# Allegro board max30208_hsp3_demo_b.brd
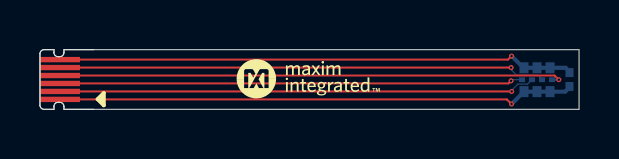
[diagram p0: board, top side]
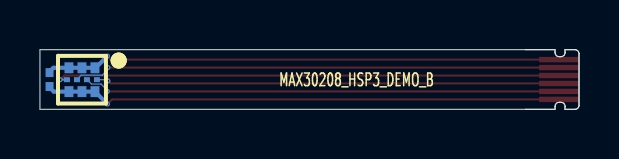
[diagram p1: board, bottom side, seen from below]

Outline 26.98 x 3 mm; copper layers: TOP, BOTTOM. Coordinates in mm from the lower left corner of the outline.
Outline path: 0,2.8 arc(0.06,2.94) 0.2,3 0.7,3 0.7,2.85 arc(0.76,2.71) 0.9,2.65 1,2.65 arc(1.14,2.71) 1.2,2.85 1.2,3 26.98,3 26.98,0 1.2,0 1.2,0.15 arc(1.14,0.29) 1,0.35 0.9,0.35 arc(0.76,0.29) 0.7,0.15 0.7,0 0.2,0 arc(0.06,0.06) 0,0.2 0,2.8

## Design rules (mm)
constraint set DEFAULT: min track width 0.064

## Placement (name value [footprint] x y rotation side)
C1  0.1UF  [CAPC0603X33M]  26.5 1.5 270 bottom
J1  TF13BA-6S-0.4SH_EDGE  [HRSC_TF13BA-6S-0_4SH_EDGE]  0 1.5 90 top
NOREF  -  []  3.79 5.04 0 top
NOREF#2  -  []  0 2.69 0 top
NOREF#3  -  []  10.82 1.53 0 top
NOREF#4  -  []  198.23 -26.02 0 top
NOREF#5  -  []  8.24 107.28 0 top
NOREF#6  -  []  23.16 -8.28 0 top
NOREF#7  -  []  26.93 0 90 top
NOREF#8  -  []  -0.03 -7.71 0 top
NOREF#9  -  []  12.68 -12.7 0 top
U1  MAX30208  [MAX_90-100101_1-10]  24.88 1.49 270 bottom

## Library data of the parts
C1 = CAP_NP: alternate symbols: 0201_NOSILK,CAPC0603X23L; part number: CAP_NP_0201CAPM-CAPC0603X33M,0.1UF,20-000U1-DA39
J1 = TF13BA-6S: part number: TF13BA-6S_SMD_EDGE-HRSC_TF13BA-6S-0_4SH_EDGE,TF13BA-6S-0.4SH_EDGE,N/A
U1 = EK_MAX30208: part number: EK_MAX30208_LGA10-MAX_90-100101_1-10,MAX30208,N/A

## Footprints (pads in the part's own frame, mm; a bottom-side part is the same pattern mirrored in y, then rotated)
CAPC0603X33M
  rect 0.45x0.4 smd: 1(-0.35,0) 2(0.35,0)
HRSC_TF13BA-6S-0_4SH_EDGE
  rect 0.27x2 smd: 1(-1,-1) 2(-0.6,-1) 3(-0.2,-1) 4(0.2,-1) 5(0.6,-1) 6(1,-1)
MAX_90-100101_1-10
  rect 0.55x0.45 smd: 1(-0.6,0.65) 2(-0.6,0) 3(-0.6,-0.65) 4(0.6,-0.65) 5(0.6,0) 6(0.6,0.65)
  rect 0.25x0.3 smd: 7(0,0.75) 8(0,0.25) 9(0,-0.25) 10(0,-0.75)

## Nets
GND_SIGNAL: C1.2 J1.1 U1.4 U1.5 U1.6
UNNAMED_1_CAPNP_I3_1: C1.1 J1.6 U1.1 U1.2 U1.3
UNNAMED_1_EKMAX30208_I4_7: J1.3 U1.7
UNNAMED_1_EKMAX30208_I4_8: J1.2 U1.8
UNNAMED_1_EKMAX30208_I4_9: J1.5 U1.9
UNNAMED_1_EKMAX30208_I4_10: J1.4 U1.10

## Via types
v1: diameter 0.254, hole 0.127, TOP to BOTTOM, 6 vias

## Routing (per net, layer and track width the routed paths; a pad name or vN(x,y) marks a point on that pad's centre or on a via; arc(x,y) is an arc through that point)
GND_SIGNAL: length 26
  TOP w0.102: J1.1 23.37,0.5 23.6,0.27 v1(23.61,0.27)
  BOTTOM w0.064: C1.2 26.5,1.1
  BOTTOM w0.203: v1(23.61,0.27) 24.23,0.89 U1.6 U1.5 U1.4 26.3,0.89 26.5,1.1
UNNAMED_1_CAPNP_I3_1: length 26
  TOP w0.102: J1.6 23.43,2.5 v1(23.61,2.68)
  BOTTOM w0.064: C1.1 26.5,1.9
  BOTTOM w0.203: 26.5,1.9 26.31,2.09 U1.3 U1.2 U1.1 24.19,2.09 v1(23.61,2.68)
UNNAMED_1_EKMAX30208_I4_7: length 23.2
  TOP w0.102: J1.3 1,1.3 23.45,1.3 v1(23.58,1.43)
  BOTTOM w0.064: v1(23.58,1.43) 23.64,1.49 U1.7
UNNAMED_1_EKMAX30208_I4_8: length 23.9
  TOP w0.102: v1(23.61,0.9) J1.2
  BOTTOM w0.064: U1.8 24.62,1.49 24.4,1.27 23.92,1.27 23.61,0.96 v1(23.61,0.9)
UNNAMED_1_EKMAX30208_I4_9: length 24.5
  TOP w0.102: v1(23.58,2.1) J1.5
  BOTTOM w0.064: v1(23.58,2.1) 23.61,2.07 23.61,1.96 23.86,1.72 24.91,1.72 25.13,1.5 U1.9
UNNAMED_1_EKMAX30208_I4_10: length 25.4
  TOP w0.102: v1(25.97,1.49) 25.76,1.7 J1.4
  BOTTOM w0.102: U1.10 v1(25.97,1.49)

## Text on the board
Ref Des/Silkscreen Bottom: MAX30208_HSP3_DEMO_B
User.8: Stiffener | NOTES: | SURFACE FINISH: | TESTING: | FINISH: | SOLDERMASK: | MISCELLANEOUS: | SILKSCREEN: | 16.  VENDOR LOGO & DATE CODE REQUIREMENT.  DATE CODE FORMAT MUST BE YYWW ONLY | TOOLING: | 17.  FINAL ELECTRICAL TEST TO BE PERFORMED USING PROVIDED IPC-D-356A NETLIST OR ODB++ FORMAT FILE. | 18.  A TIME DOMAIN REFLECTOMETER REPORT FOR EACH IMPEDANCE CONTROLLED LAYER AND A CERTIFICATE | 19. IF PRESENT, ALL BLIND/BURIED VIAS WITH AN ASPECT RATIO <1:1 TO BE PLATED SHUT WITH COPPER WHEN | 20.  FOR ALL DRILL INFORMATION REFER TO DRILL CHART. | 21.  FINISHED SURFACE CONTACTS AND FILLED VIAS TO BE FREE OF ANY PITS. SCRATCHES PROBE MARKS | 23.  PEMNUT | 14.  SOLDERMASK OVER BARE COPPER OR BARE GOLD (BOTH SIDES) WITH LIQUID PHOTO IMAGEABLE (LPI) INK | 13.  DRILL SIZES ARE FINISHED HOLE SIZES. ALL HOLES SHALL BE LOCATED WITHIN .005 DTP,UNLESS SPECIFIED. | 22.  THIEVING: | 15. APPLY SILKSCREEN USING A NON-CONDUCTIVE EPOXY INK | 12. USE CHECKED ITEMS FOR PLATING | 9.  ALL TRACES FILLETED OPTION TO ENHANCE RELIABILITY AT PAD JUNCTIONS | 10.  LAYER TO LAYER REGISTRATIONS SHALL BE WITHIN .003 INCHES. | 11.  FINISHED COPPER WEIGHT/THICKNESS: | 1.  DIMENSIONS ARE IN INCHES (EXCEPT WHERE NOTED). | 3.  THE PCB SHALL BE FABRICATED TO IPC-6013, CLASS 2, TYPE 1, 2, and 3 (WHICHEVER APPLIES). | 4.  BOARD MATERIAL & CONSTRUCTION SHALL MEET THE REQUIREMENTS OF UL796F | 5.  OVERALL BOARD THICKNESS REFER TO LAMINATION DIAGRAM. TOLERANCE APPLIES | 6.  BOW & TWIST NOT TO EXCEED 0.0075 IN. (0.75%) PER LINEAR INCH. | 7.  PHOTO ETCH CIRCUITRY PER ENCLOSED GERBER RS274X OR ODB++ FORMAT FILE. | 8.  IMPEDANCE REQUIREMENTS: IF NO STACKUP IS DEFINED, THE VENDOR IS ALLOWED TO ADJUST THE DIELECTRIC | 2.  LAMINATE MATERIAL: | A. FLEX SECTION(PER IPC-4202, IPC-4203, IPC-4204 WHERE APPLICABLE): | B. COVERLAY | C.FLEX-LPI | D. STIFFENER: | (X)  FINISH CONDUCTOR SURFACES: IMMERSION GOLD, 1.58-3.94 MICRO INCHES OVER | (X)  WHITE | ( )  OTHER ________________________ | (X)  FINGERS TO BE GOLD PLATED. | (X)  PLACE ON BOTTOM LEGEND LAYER. IF NO BOTTOM LEGEND SUPPLIED, CREATE BOTTOM LEGEND LAYER TO ADD. | ( )  PLACE ON TOP LEGEND LAYER. IF NO TOP LEGEND SUPPLIED,CREATE TOP LEGEND LAYER TO ADD. | ( )  ELECTRODEPOSITED HARD GOLD PLATE, TYPE 1 (99.7% MIN GOLD), GRADE C | (X)  CUSTOM MAXIM TEAL SOLDER MASK. PANTONE #326C. | MINIMUM BARREL PLATING OF .001 IN. PLATED HOLES SHALL NOT BE ROUGH OR IRREGULAR SO AS TO | HINDER PROPER SOLDER WICKING. BARREL RELIEF ON SOLDERMASK ALLOWED ON UNFILLED VIA IN PAD HOLES. | USED AS VIA-IN PAD OR AS A STACKED VIA. BLIND/BURIED VIAS WITH AN ASPECT RATIO >1:1 TO BE FILLED | WITH NON-CONDUCTIVE EPOXY. UNLESS OTHERWISE SPECIFIED. | ( )  NON-CONDUCTIVE EPOXY. FILL AND CAP ALL 0.XXXX INCH DRILLED VIAS. | ( )  SILVER. FILL AND CAP ALL 0.XXXX INCH DRILLED VIAS. | (REQUIRED UNLESS OTHERWISE SPECIFIED IN QUOTE) | THE PCB SHALL HAVE A VERIFICATION STAMP. | OR OTHER DEFORMITIES THAT COULD EFFECT THE APPERANCE AND PERFORMACE OF THE CONTACT | SURFACE. CONTACTS ARE TO BE AS FLAT AS POSSIBLE. NOT TO EXCEED +/- 0.001" OF FLATNESS. | (X)  REFER TO LAMINATION DIAGRAM FOR FINISHED COPPER WEIGHT/THICKNESS REQUIREMENTS. | OF COMPLIANCE SHALL BE PROVIDED BY VENDOR AT TIME OF SHIPMENT. INSTANCES WHERE TDR TESTING | CAN'T BE PERFORMED BECAUSE THE TRACE LENGTH IS TOO SHORT ON THE OUTER LAYERS AT THE PIN ESCAPES | IS ACCEPTABLE, ALL OTHER INSTANCES MUST BE REPORTED. | ( )  SUPPLIER MAY ADD THIEVING TO COMPENSATE FOR LOW COPPER DENSITY AREAS ON THIS DESIGN. | (X)  SUPPLIER MAY NOT ADD THIEVING TO COMPENSATE FOR LOW COPPER DENSITY AREAS ON THIS DESIGN. | ( )  PEMNUTS TO BE INSTALLED BY FABRICATOR.. | ( )  PEMNUTS NOT TO BE INSTALLED BY FABRICATOR. | (X)  NOT APPLICABLE. | ADHESIVE MATERIAL | ( )  DUPONT PYRALUX FR (OR EQUIVALENT) | (X)  TAIYO PSR-9000  (OR EQUIVALENT) | ( )  FR4 | ADHESIVELESS CONSTRUCTION | ADHESIVE CONSTRUCTION | ( )  OTHERS | (X)  THERMAL BOND-DUPONT PYRALUX FR (OR EQUIVALENT). RECOMMENDED FOR EDGE FINGER ON FLEX | ( )  PSA-3M467  (OR EQUIVALENT) | ( )  POLYIMIDE | (X)  DUPONT PYRALUX FR (OR EQUIVALENT) | WORKMANSHIP SHALL CONFORM TO IPC-A-600, CLASS 2, CURRENT REVISIONS. | WITH FLAMMABILITY RATING OF 94V-O. | AFTER ALL LAMINATION AND PLATING PROCESSES. IT IS TO BE MEASURED FROM | TOP PCB METAL TO BOTTOM PCB METAL UNLESS OTHERWISE SPECIFIED. | BOW & TWIST SHOULD BE MEASURED PER IPC-TM-650, METHOD 2.4.22. | DRILL LOCATION AND SIZE CONTROLLED BY EXCELLON CNC DRILL FILE. | THICKNESS AND TRACE WIDTHS TO MEET THE IMPEDANCE REQUIREMENT. IF SPECIFIED, VENDOR MUST FOLLOW AND | MEET THE REQUIREMENTS LISTED IN THE IMPEDANCE TABLE. ANY ADJUSTMENTS MADE TO THE DEFINED STACKUP, | TRACE WIDTH & SPACING THAT IMPACT THE REQUIREMENTS MUST HAVE WRITTEN APPROVAL FROM MAXIM. | WHERE SPACING PERMITS. | LEGEND TO LEGEND +/- 0.007 INCHES | ( )  FILLETED | (X)  NOT FILLETED | (X)  DUPONT PYRALUX AP (OR EQUIVALENT) | UNLESS OTHERWISE SPECIFIED | (KNOOP HARDNESS 130-200), CLASS 1 (50-100 MICRO INCHES THICK) IN ACCORDANCE WITH MIL-G-45204C. | GENERAL SURFACING REQUIREMENTS MUST MEET ANSI/IPC-A-600(CURRENT REV) SECTION 4.0, | CLASS 3 (50-100 MICROINCHES THICK) OVER ELECTRODEPOSITED NICKEL PLATE | IN ACCORDANCE WITH ANSI/IPC-A-600D, SECTION 4.0, CLASS 3 (200-600 MICROINCHES THICK). | 50-236 MICRO INCHES MINIMUM OF ELECTROLESS NICKEL. | THE STARTING COPPER WEIGHT/THICKNESS CAN VARY AS LONG AS THE FINISHED COPPER | WEIGHT/THICKNESS IS NOT LESS THAN THE SPECIFIED VALUE, UNLESS OTHERWISE SPECIFIED. | (USE CHECKED ITEMS FOR PLATING) | (USE CHECKED ITEMS FOR TOOLING) | (USE CHECKED ITEMS FOR MATERIAL) | UNLESS OTHERWISE SPECIFIED: | MAX30208_HSP3_DEMO_B
User.17: * STIFFENERS LOCATED ON BOTH ENDS OF THE FLEX BOARD 120 MILS x 150 MILS (TWO PLACES) | * OVERALL THICKNESS WITH STIFFENER INSTALLED IS 7.9 MILS +1.2/-1.2 MILS
User.34: FIGURE | SIZE | 5.0 | TOLERANCE | +3.0/-3.0 | PLATED | ALL UNITS ARE IN MILS | QTY | 6 | NOTES | DRILL CHART: TOP to BOTTOM
